# EAGLE board pcb (EAGLE 6.1)
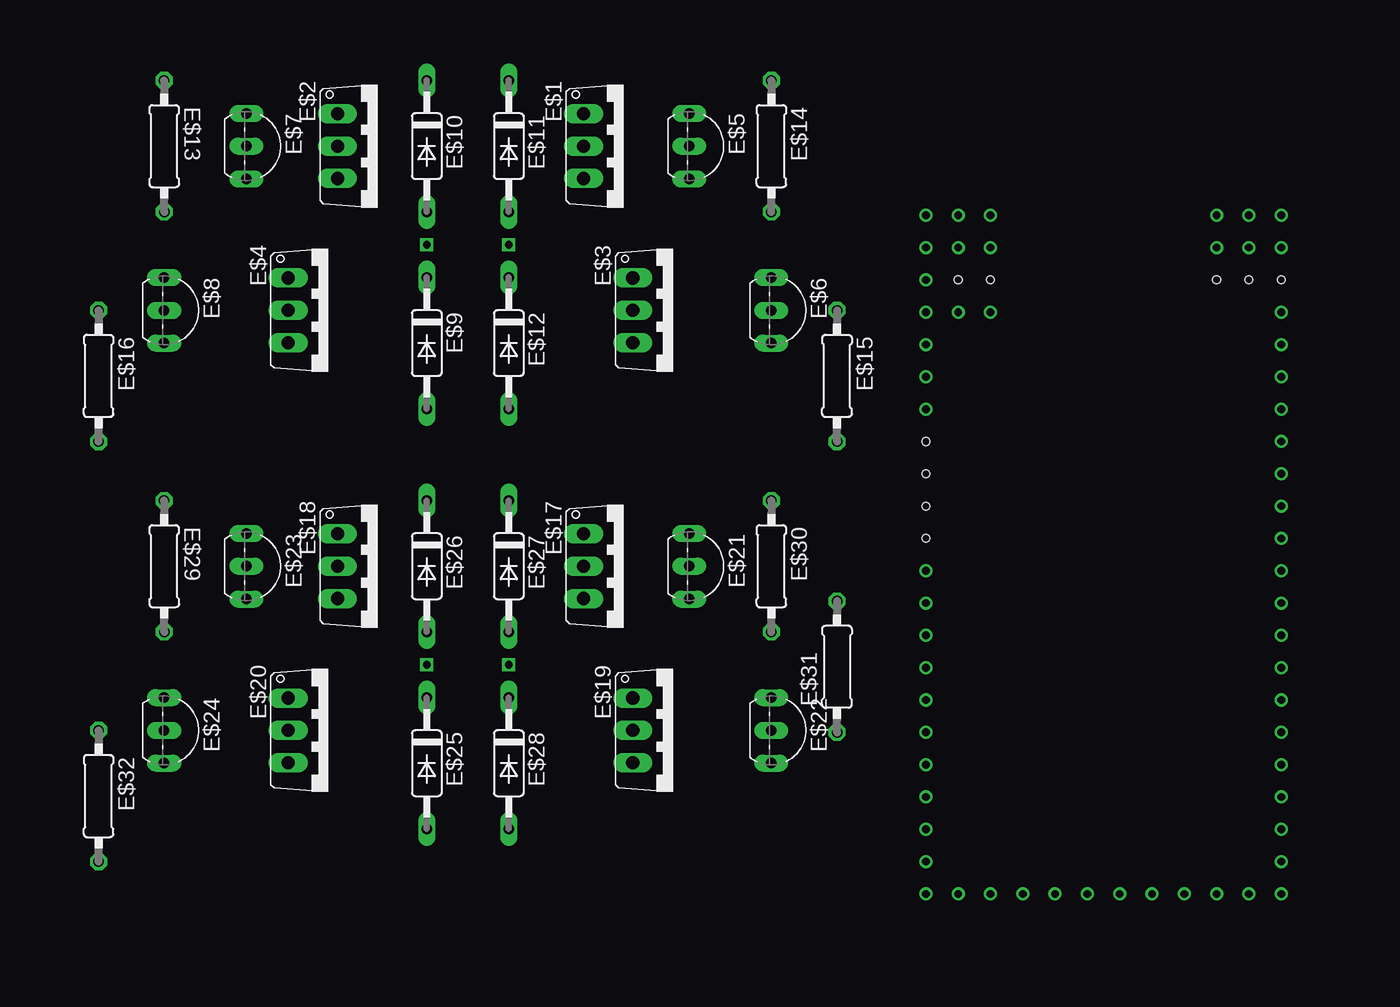
[diagram p0: board, top side]
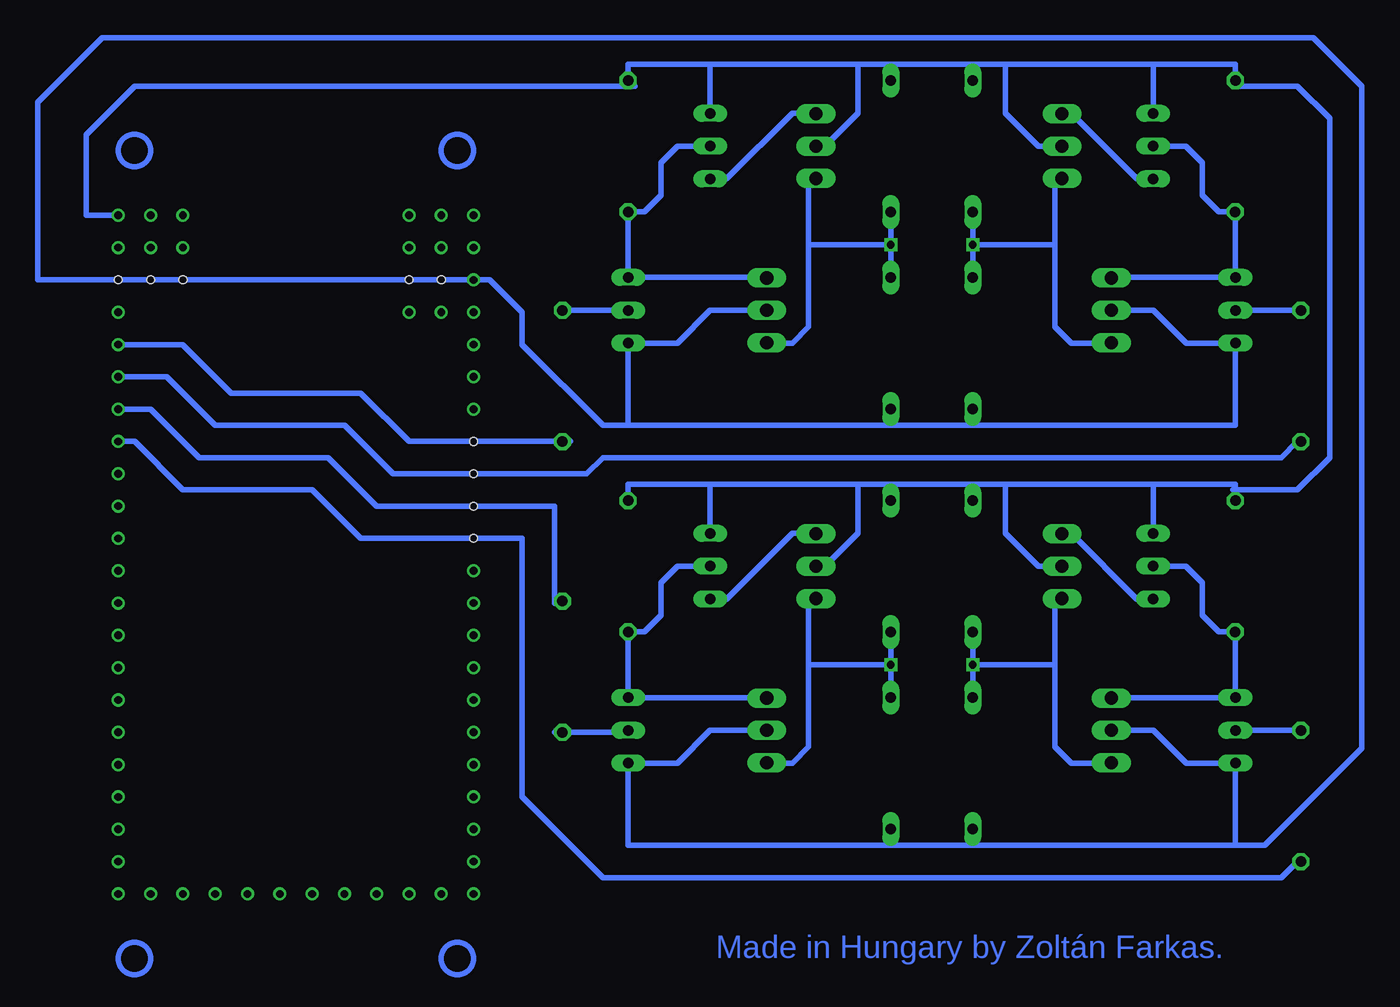
[diagram p1: board, bottom side, seen from below]

No outline drawn. Coordinates in mm, seen from the top.
Copper layers (1*16): Top 0.035mm / dielectric 1.5mm / Bottom 0.035mm
Design rules: minimum track width 10mil, minimum drill 24mil, track to track 8mil, track to pad 8mil, pad to pad 8mil, via to via 8mil, smd to smd 8mil, copper to edge 40mil, drill to drill 8mil, minimum pad ring 10mil, minimum via ring 8mil, stop-mask expansion 4mil, vias tented up to drill 0mil, thermal gap 10mil
Holes 0.6 mm at 46.25,78.75 46.25,76.25 46.25,73.75 68.75,91.25 71.25,91.25 48.75,91.25 51.25,91.25 73.75,91.25 46.25,71.25

## Footprints (pad centres in the part's own frame; a part is rotated, then mirrored left to right if it is on the bottom)
T-30_V = drill 1.016 long: 1 -2.5,-3.1; 2 0,-3.1; 3 2.5,-3.1
TO92-BCE = drill 0.813 long: B -2.54,0; C 0,0; E 2.54,0
C2992 = drill 0.813 long: A 5.08,0; C -5.08,0
0207/10 = drill 0.813 octagon: 1 -5.08,0; 2 5.08,0

## Placement (x,y rotation side)
E$1  [T-30_V]  22.86,101.6 270 top
E$2  [T-30_V]  3.81,101.6 270 top
E$3  [T-30_V]  26.67,88.9 270 top
E$4  [T-30_V]  0,88.9 270 top
E$5  [TO92-BCE]  27.94,101.6 270 top
E$6  [TO92-BCE]  34.29,88.9 270 top
E$7  [TO92-BCE]  -6.35,101.6 270 top
E$8  [TO92-BCE]  -12.7,88.9 270 top
E$9  [C2992]  7.62,86.36 270 top
E$10  [C2992]  7.62,101.6 270 top
E$11  [C2992]  13.97,101.6 270 top
E$12  [C2992]  13.97,86.36 270 top
E$13  [0207/10]  -12.7,101.6 270.1 top
E$14  [0207/10]  34.29,101.6 270 top
E$15  [0207/10]  39.37,83.82 270 top
E$16  [0207/10]  -17.78,83.82 270 top
E$17  [T-30_V]  22.86,69.1 270 top
E$18  [T-30_V]  3.81,69.1 270 top
E$19  [T-30_V]  26.67,56.4 270 top
E$20  [T-30_V]  0,56.4 270 top
E$21  [TO92-BCE]  27.94,69.1 270 top
E$22  [TO92-BCE]  34.29,56.4 270 top
E$23  [TO92-BCE]  -6.35,69.1 270 top
E$24  [TO92-BCE]  -12.7,56.4 270 top
E$25  [C2992]  7.62,53.86 270 top
E$26  [C2992]  7.62,69.1 270 top
E$27  [C2992]  13.97,69.1 270 top
E$28  [C2992]  13.97,53.86 270 top
E$29  [0207/10]  -12.7,69.1 270.1 top
E$30  [0207/10]  34.29,69.1 270 top
E$31  [0207/10]  39.37,61.32 90 top
E$32  [0207/10]  -17.78,51.32 270 top

## Library data of the parts
E$1-E$8 E$17-E$24 = transistor
E$9-E$12 E$25-E$28 = diode
E$13-E$16 E$29-E$32 = resistor

## Nets
S$1: E$8.C E$16.1
S$2: E$7.C E$8.B
S$3: E$5.E
S$4: E$23.C E$24.B
S$6: E$7.E
S$7: E$5.B E$7.B E$10.C E$11.C E$14.1
S$9: E$9.C E$10.A
S$10: E$11.A E$12.C
S$12: E$6.C E$15.1
S$13: E$6.E E$8.E E$9.A E$12.A
S$14: E$5.C E$6.B E$14.2
S$33: E$24.C E$32.1
S$49: E$23.E
S$50: E$25.C E$26.A
S$55: E$27.A E$28.C
S$56: E$21.B E$23.B E$26.C E$27.C E$30.1
S$57: E$21.E
S$59: E$22.E E$24.E E$25.A E$28.A
S$60: E$21.C E$22.B E$30.2

## Tracks (layer width: path | path; a pad name or v marks a point on that pad's centre or on a via)
S$1
  Bottom 0.406: E$8.C E$16.1
S$2
  Bottom 0.406: E$7.C -8.87,101.6 -10.16,100.31 -10.16,97.79 -11.43,96.52 -12.7,96.52 E$8.B -2.54,91.44
S$3
  Bottom 0.406: E$5.E 26.67,99.06 21.59,104.14 20.32,104.14
S$4
  Bottom 0.406: E$23.C -8.87,69.1 -10.16,67.81 -10.16,65.29 -11.43,64.02 -12.7,64.02 E$24.B -2.54,58.94
S$6
  Bottom 0.406: 1.27,104.14 0,104.14 -5.08,99.06 E$7.E
S$7
  Bottom 0.406: 20.32,101.6 19.05,101.6 16.51,104.14 16.51,107.95 | 1.27,101.6 2.54,101.6 5.08,104.14 5.08,107.95 | -12.7,106.68 -12.7,107.95 -6.35,107.95 | -6.35,107.95 5.08,107.95 | 5.08,107.95 7.62,107.95 | 7.62,107.95 13.97,107.95 | 13.97,107.95 16.51,107.95 | 16.51,107.95 27.94,107.95 | 27.94,107.95 34.29,107.95 E$14.1 | E$10.C 7.62,107.95 | E$11.C 13.97,107.95 | E$7.B -6.35,107.95 | E$5.B 27.94,107.95
S$8  (via drill 0.6)
  other vias: 46.25,68.75
S$9  (via drill 0.6)
  Bottom 0.406: E$10.A v7.62,93.98 | v7.62,93.98 E$9.C | 0,86.36 -2.54,86.36 0,86.36 | 0,86.36 1.27,87.63 1.27,93.98 | 1.27,93.98 1.27,99.06 | v7.62,93.98 1.27,93.98
S$10  (via drill 0.6)
  Bottom 0.406: E$11.A v13.97,93.98 | v13.97,93.98 E$12.C | 20.32,99.06 20.32,93.98 | 20.32,93.98 20.32,87.63 21.59,86.36 24.13,86.36 | v13.97,93.98 20.32,93.98
S$11
  Bottom 0.406: 33.75,56.25 40,56.25
S$12
  Bottom 0.406: E$6.C E$15.1
S$13
  Bottom 0.406: 24.13,88.9 27.94,88.9 30.48,86.36 E$6.E 34.29,80.01 13.97,80.01 | E$12.A 13.97,80.01 | E$9.A 7.62,80.01 | 13.97,80.01 7.62,80.01 | 7.62,80.01 -12.7,80.01 E$8.E -8.89,86.36 -6.35,88.9 -2.54,88.9
S$14
  Bottom 0.406: E$5.C 30.48,101.6 31.75,100.33 31.75,97.79 33.02,96.52 E$14.2 E$6.B 24.13,91.44
S$15  (via drill 0.6)
  other vias: 46.25,66.25
S$16  (via drill 0.6)
  other vias: 48.75,88.75
S$17  (via drill 0.6)
  other vias: 46.25,63.75
S$18  (via drill 0.6)
  other vias: 73.75,76.25
S$19  (via drill 0.6)
  other vias: 46.25,61.25
S$20
  Bottom 0.406: 40,66.25 40,73.75 53.75,73.75 57.5,77.5 67.5,77.5 71.25,81.25 73.75,81.25
S$21  (via drill 0.6)
  other vias: 73.75,73.75
S$22  (via drill 0.6)
  other vias: 46.25,83.75
S$23  (via drill 0.6)
  other vias: 46.25,58.75
S$24  (via drill 0.6)
  other vias: 46.25,86.25
S$25  (via drill 0.6)
  other vias: 46.25,56.25
S$26  (via drill 0.6)
  other vias: 46.25,88.75
S$27  (via drill 0.6)
  other vias: 46.25,53.75
S$28
  Bottom 0.406: -12.5,106.25 -17.5,106.25 -20,103.75 -20,77.5 -17.5,75 -12.5,75
S$29  (via drill 0.6)
  other vias: 46.25,51.25
S$30  (via drill 0.6)
  other vias: 46.25,93.75
S$31  (via drill 0.6)
  other vias: 46.25,48.75
S$32  (via drill 0.6)
  Bottom 0.406: 38.75,78.75 51.25,78.75 55,82.5 65,82.5 68.75,86.25 v73.75,86.25
S$33
  Bottom 0.406: E$24.C E$32.1
S$34  (via drill 0.6)
  other vias: 48.75,96.25
S$35  (via drill 0.6)
  other vias: 46.25,46.25
S$36  (via drill 0.6)
  other vias: 46.25,43.75
S$37  (via drill 0.6)
  other vias: 48.75,43.75
S$38  (via drill 0.6)
  other vias: 51.25,43.75
S$39  (via drill 0.6)
  other vias: 53.75,43.75
S$40  (via drill 0.6)
  other vias: 56.25,43.75
S$41  (via drill 0.6)
  other vias: 58.75,43.75
S$42  (via drill 0.6)
  other vias: 61.25,43.75
S$43  (via drill 0.6)
  other vias: 48.75,93.75
S$44  (via drill 0.6)
  other vias: 51.25,93.75
S$45  (via drill 0.6)
  other vias: 63.75,43.75
S$46  (via drill 0.6)
  other vias: 51.25,96.25
S$47  (via drill 0.6)
  other vias: 46.25,96.25
S$48  (via drill 0.6)
  Bottom 0.406: 33.75,106.25 72.5,106.25 76.25,102.5 76.25,96.25 v73.75,96.25
S$49
  Bottom 0.406: 1.27,71.64 0,71.64 -5.08,66.56 E$23.E
S$50  (via drill 0.6)
  Bottom 0.406: E$26.A v7.62,61.48 | v7.62,61.48 E$25.C | 0,53.86 -2.54,53.86 0,53.86 | 0,53.86 1.27,55.13 1.27,61.48 | 1.27,61.48 1.27,66.56 | v7.62,61.48 1.27,61.48
S$51  (via drill 0.6)
  other vias: 68.75,93.75
S$52  (via drill 0.6)
  other vias: 71.25,93.75
S$53  (via drill 0.6)
  other vias: 68.75,96.25
S$54  (via drill 0.6)
  other vias: 71.25,96.25
S$55  (via drill 0.6)
  Bottom 0.406: E$27.A v13.97,61.48 | v13.97,61.48 E$28.C | 20.32,66.56 20.32,61.48 | 20.32,61.48 20.32,55.13 21.59,53.86 24.13,53.86 | v13.97,61.48 20.32,61.48
S$56
  Bottom 0.406: 20.32,69.1 19.05,69.1 16.51,71.64 16.51,75.45 | 1.27,69.1 2.54,69.1 5.08,71.64 5.08,75.45 | -12.7,74.18 -12.7,75.45 -6.35,75.45 | -6.35,75.45 5.08,75.45 | 5.08,75.45 7.62,75.45 | 7.62,75.45 13.97,75.45 | 13.97,75.45 16.51,75.45 | 16.51,75.45 27.94,75.45 | 27.94,75.45 34.29,75.45 E$30.1 | E$26.C 7.62,75.45 | E$27.C 13.97,75.45 | E$23.B -6.35,75.45 | E$21.B 27.94,75.45
S$57
  Bottom 0.406: E$21.E 26.67,66.56 21.59,71.64 20.32,71.64
S$58  (via drill 0.6)
  other vias: 51.25,88.75
S$59
  Bottom 0.406: 24.13,56.4 27.94,56.4 30.48,53.86 E$22.E 34.29,47.51 13.97,47.51 | E$28.A 13.97,47.51 | E$25.A 7.62,47.51 | 13.97,47.51 7.62,47.51 | 7.62,47.51 -12.7,47.51 E$24.E -8.89,53.86 -6.35,56.4 -2.54,56.4
S$60
  Bottom 0.406: E$21.C 30.48,69.1 31.75,67.83 31.75,65.29 33.02,64.02 E$30.2 E$22.B 24.13,58.94
S$61
  Bottom 0.406: -17.5,46.25 -16.25,45 36.25,45 42.5,51.25 42.5,71.25 55,71.25 58.75,75 68.75,75 72.5,78.75 73.75,78.75
S$62  (via drill 0.6)
  other vias: 73.75,83.75
S$63
  Bottom 0.406: -17.5,78.75 -16.25,77.5 36.25,77.5 37.5,76.25 52.5,76.25 56.25,80 66.25,80 70,83.75 73.75,83.75
S$64  (via drill 0.6)
  other vias: 46.25,81.25
S$65  (via drill 0.6)
  other vias: 73.75,81.25
S$66  (via drill 0.6)
  other vias: 73.75,78.75
S$67  (via drill 0.6)
  Bottom 0.406: -12.5,47.5 -15,47.5 -22.5,55 -22.5,106.25 -18.75,110 75,110 80,105 80,91.25 v46.25,91.25 45,91.25 42.5,88.75 42.5,86.25 36.25,80 33.75,80
S$75  (via drill 0.6)
  other vias: 66.25,43.75
S$76  (via drill 0.6)
  other vias: 68.75,43.75
S$77  (via drill 0.6)
  other vias: 71.25,43.75
S$78  (via drill 0.6)
  other vias: 73.75,43.75
S$79  (via drill 0.6)
  other vias: 73.75,46.25
S$80  (via drill 0.6)
  other vias: 73.75,48.75
S$81  (via drill 0.6)
  other vias: 73.75,51.25
S$82  (via drill 0.6)
  other vias: 73.75,53.75
S$83  (via drill 0.6)
  other vias: 73.75,56.25
S$84  (via drill 0.6)
  other vias: 73.75,58.75
S$85  (via drill 0.6)
  other vias: 73.75,61.25
S$86  (via drill 0.6)
  other vias: 73.75,63.75
S$87  (via drill 0.6)
  other vias: 73.75,66.25
S$88  (via drill 0.6)
  other vias: 73.75,68.75
S$89  (via drill 0.6)
  other vias: 73.75,71.25
S$96  (via drill 0.6)
  other vias: 73.75,88.75
S$98  (via drill 0.6)
  other vias: 73.75,93.75
(copper drawn outside any net)
  shapes: Bottom circle x4

## Text on the board
Bottom: Made in Hungary by Zoltán Farkas.